# Altium PCB STM32最小系统.PcbDoc
Units mil, origin at the board's own origin, x right, y up, seen from the top; angles counter-clockwise.
Board outline 1973 x 2689 mil, 2 copper layers (Top Layer, Bottom Layer); 45 components, 128 nets, 386 pads, 63 vias.
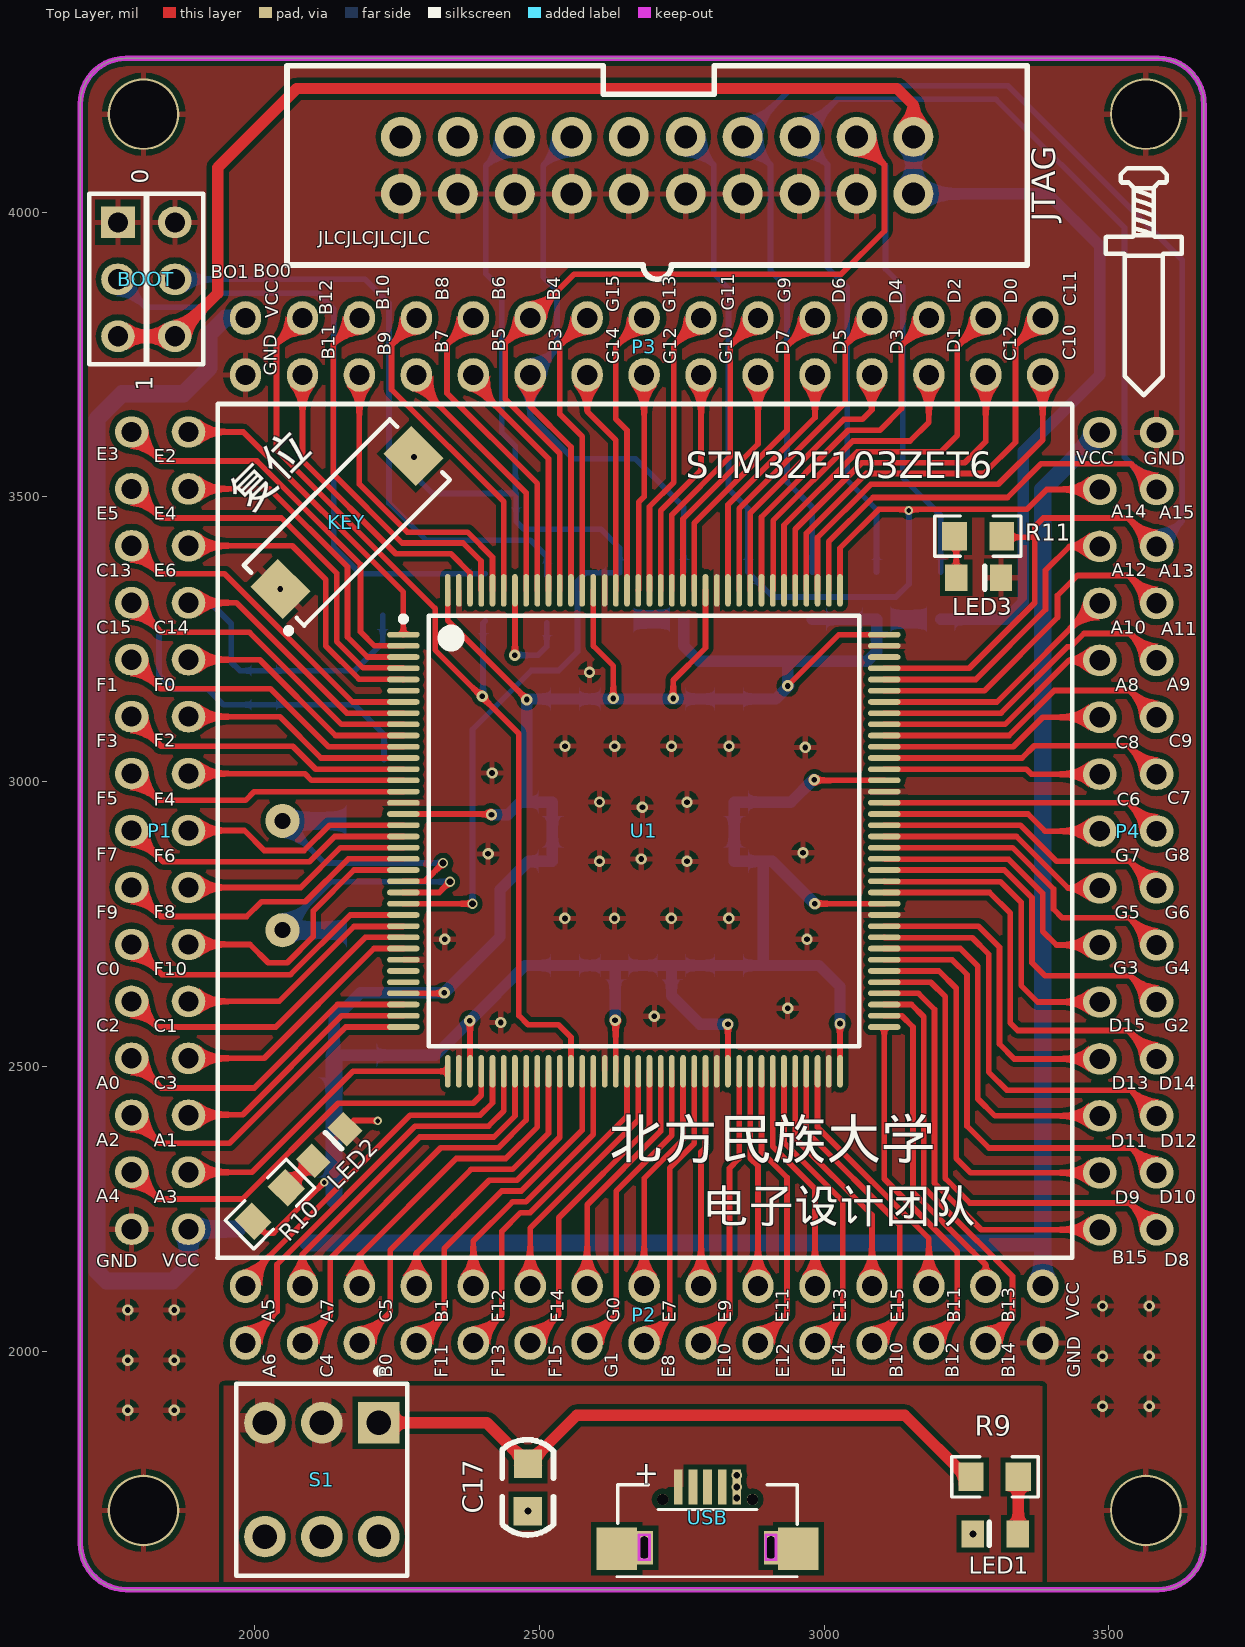
[diagram p0: Top Layer view]
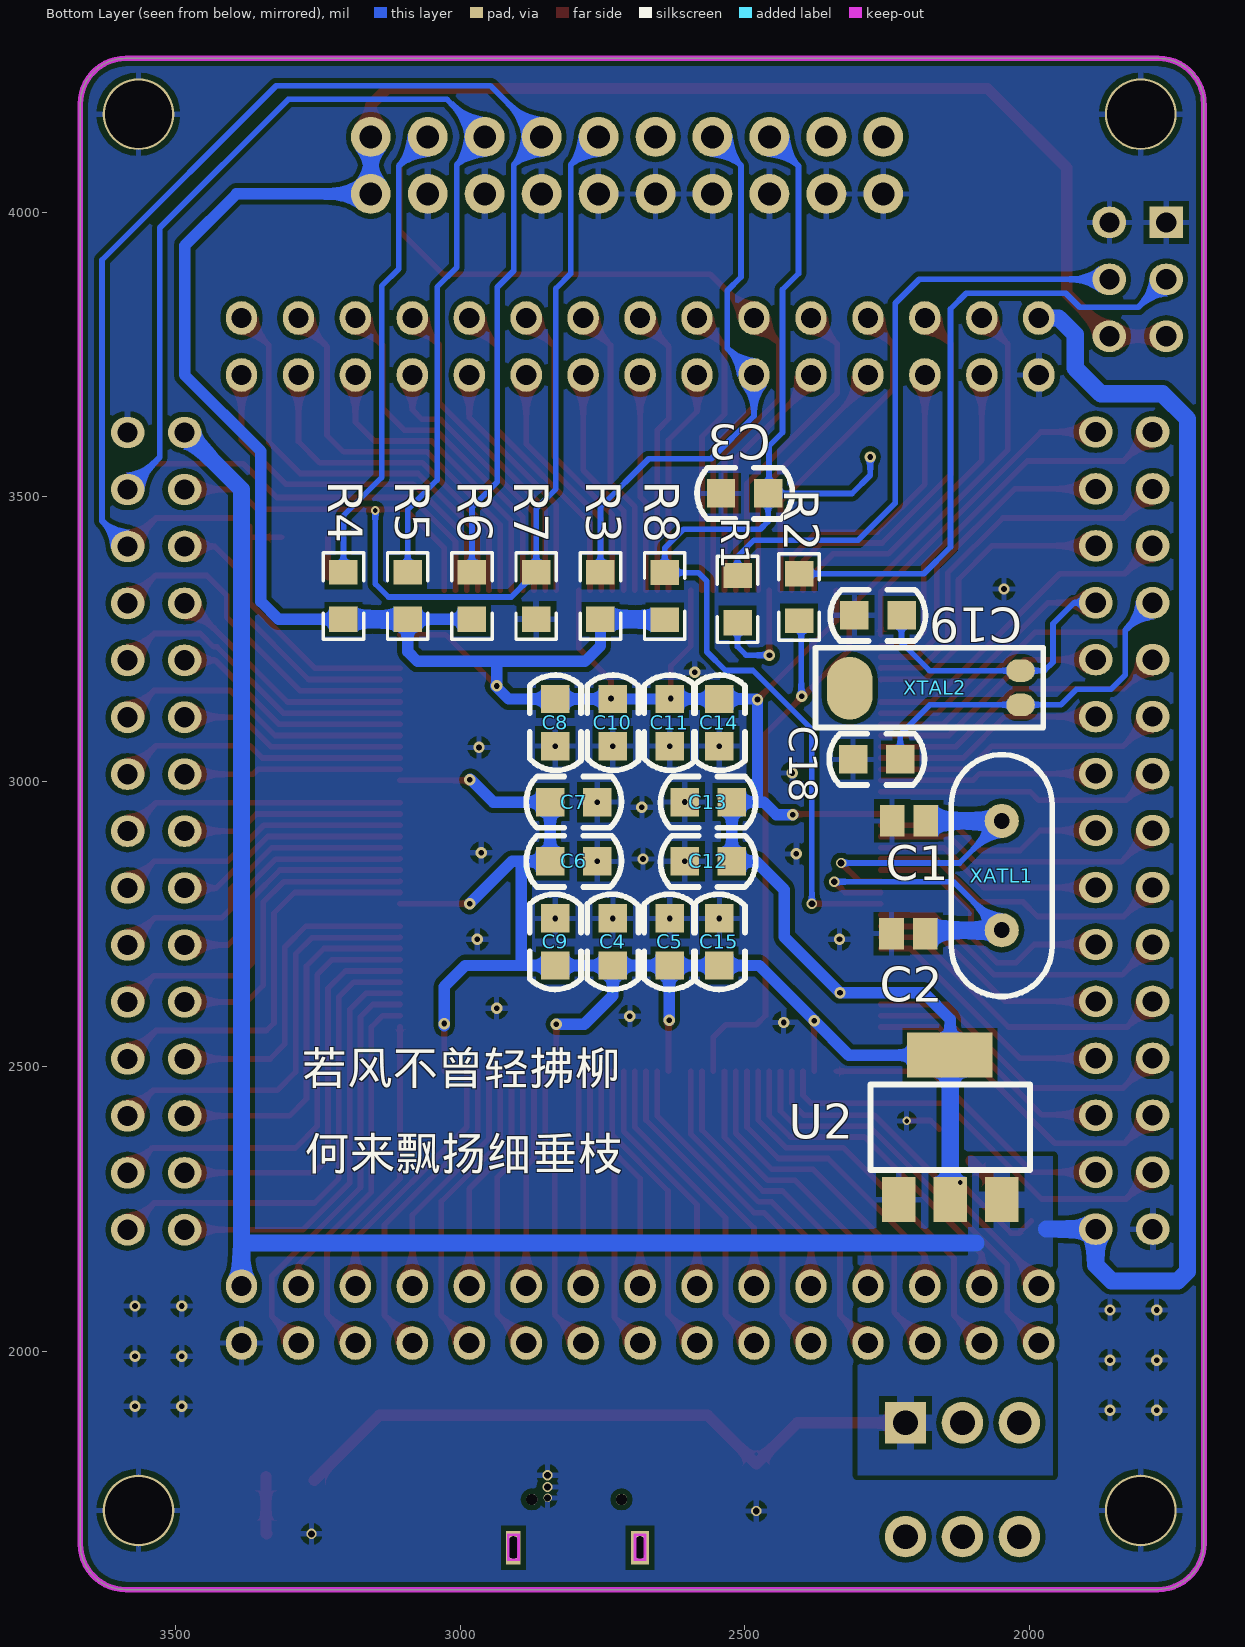
[diagram p1: Bottom Layer view, seen from below]
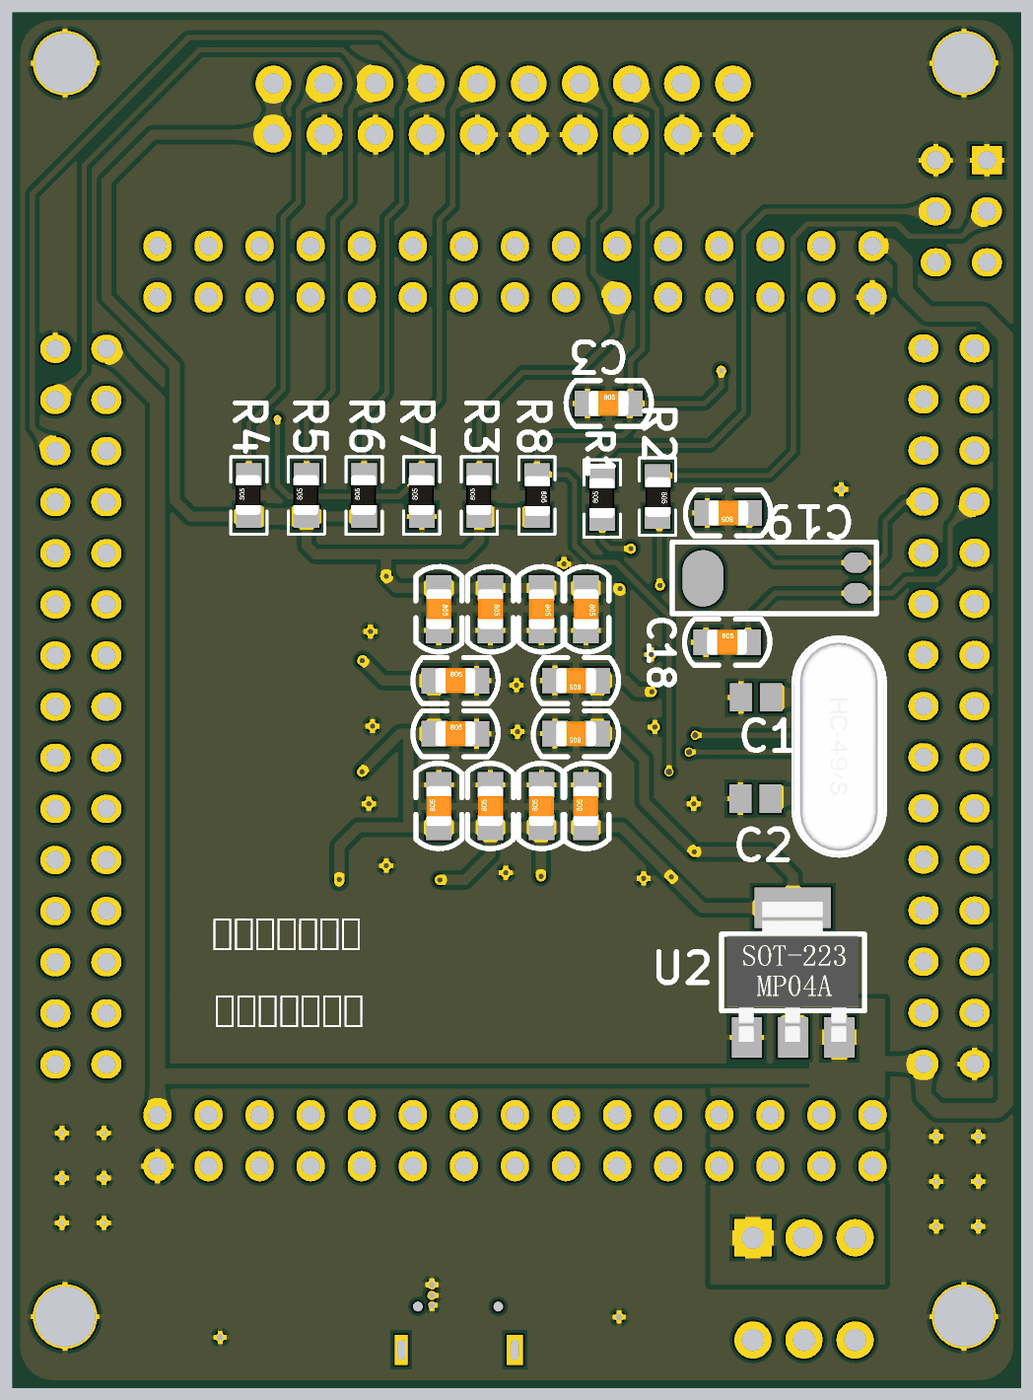
[diagram p2: 3D render of the assembled board from below, using the file's embedded part models]

## Layer stack, top to bottom
Top Solder: solder mask 0.4, Solder Resist, Dk 3.5
Top Layer: signal copper 1.4
Dielectric 1: dielectric 12.6, FR-4, Dk 4.8
Bottom Layer: signal copper 1.4
Bottom Solder: solder mask 0.4, Solder Resist, Dk 3.5

## Board outline
1694,1662.76 ccw(c1775.25,1662.25) 1774.75,1581 3587,1581 ccw(c3587,1661) 3667,1661 3667,4190 ccw(c3587,4190) 3587,4270 1774,4270 ccw(c1774,4190) 1694,4190

## Design rules (kind name [scope] priority, off if disabled: settings)
Clearance [All] p1: gap=9
ComponentClearance [All] p1: gap=0 collisioncheckmode=3 verticalgap=0 showdistances=FALSE
HoleSize [All] p1: absolutevalues=TRUE maxlimit=10000 minlimit=1 maxpercent=80.000 minpercent=20.000
PolygonConnect [All] p1: connectstyle=Relief reliefconductorwidth=10 reliefentries=4 polygonreliefangle="90 Angle" airgapwidth=10
RoutingVias [All] p1: holewidth=28 width=50 viastyle="Through Hole" minholewidth=28 minwidth=50 maxholewidth=28 maxwidth=50
SolderMaskExpansion [All] p1: expansion=4
Width [All] p1: maxlimit=100 minlimit=10 preferedwidth=10
28 further rules are at their usual default settings.

## Components (designator, comment, footprint, x,y, rotation, side; value= is the part's Value field where it differs from the comment)
BOOT "Header 3X2" HDR2X3 1760,3982 r270 top
C1 "C" C0805#1 2212,2931 r0 bottom
C2 "C" C0805#1 2213,2733 r0 bottom
C3 "10UF" C0805#2 2548,3506 r180 bottom
C4 "104" C0805#2 2732,2671 r90 bottom
C5 "104" C0805#2 2632,2671 r90 bottom
C6 "104" C0805#2 2848,2860 r180 bottom
C7 "104" C0805#2 2848,2964 r180 bottom
C8 "104" C0805#2 2833,3151 r270 bottom
C9 "104" C0805#2 2833,2671 r90 bottom
C10 "104" C0805#2 2732,3151 r270 bottom
C11 "104" C0805#2 2632,3151 r270 bottom
C12 "104" C0805#2 2517,2860 r0 bottom
C13 "104" C0805#2 2517,2964 r0 bottom
C14 "104" C0805#2 2545,3151 r270 bottom
C15 "104" C0805#2 2545,2671 r90 bottom
C17 "104" C0805#2 2480,1713 r90 top
C18 "30pf" C0805#2 2316,3039 r180 bottom
C19 "30pf" C0805#2 2219,3292 r0 bottom
JTAG "Header 10X2" "JTAG - duplicate1" 2707,4082 r270 top
KEY "TDS-3" TDS-3 2162,3455 r225 top
LED1 "LED" LED 3340,1679 r180 top
LED2 "LED" LED 2103,2334 r45 top
LED3 "LED" LED 3232,3358 r0 top
P1 "Header 15X2" HDR2X15 1884,2214 r90 top
P2 "Header 15X2" HDR2X15 3384,2114 r180 top
P3 "Header 15X2" HDR2X15 3384,3814 r180 top
P4 "Header 15X2" HDR2X15 3584,2213 r90 top
R1 "100k" "PCBComponent_1 - duplicate1" 2513,3324 r270 bottom
R2 "100k" "PCBComponent_1 - duplicate1" 2405,3320 r90 bottom
R3 "10k" "PCBComponent_1 - duplicate1" 2640.86,3321.97 r90 bottom
R4 "10k" "PCBComponent_1 - duplicate1" 3205,3330 r270 bottom
R5 "10k" "PCBComponent_1 - duplicate1" 3092.17,3330 r270 bottom
R6 "10k" "PCBComponent_1 - duplicate1" 2979.34,3330 r270 bottom
R7 "10k" "PCBComponent_1 - duplicate1" 2866.51,3330 r270 bottom
R8 "10k" "PCBComponent_1 - duplicate1" 2753.69,3330 r270 bottom
R9 "1k" "PCBComponent_1 - duplicate1" 3296,1779 r0 top
R10 "471" "PCBComponent_1 - duplicate1" 2024,2255 r45 top
R11 "471" "PCBComponent_1 - duplicate1" 3274,3431 r180 top
S1 "SW-DPDT" DPDT-6 2118,1774 r270 top
U1 "STM32F103Z" LQFP-144N 2683.5,2913.5 r0 top
U2 "LM1117" SOT-223 2142,2396 r180 bottom
USB "Micro USB" "PCBComponent_1 - duplicate2" 2786,1713 r270 top
XATL1 "8MHz" 49/S_N 2049,2931 r270 bottom
XTAL2 "XTAL_32.768K" XTAL_32.768K 2316,3164 r180 bottom

## Footprints (in the part's own frame and the unit in brackets; to place one, negate y for a bottom-side part, rotate by r counter-clockwise, add the part's x,y. Pads: shape width x height; smd on the part's side, far side on the other; paste and mask are expansions set on the pad)
49/S_N [mil] "短型晶振（未加焊）"
  round 60 hole 28: 1(0,0) 2(192,0)
  silkscreen extent -116,-89 308,88, body extent -116,-89 309,88, height 138
C0805#1 [mm] "Chip Capacitor, Body 2.0x1.3mm, IPC High Density"
  rect 1.1x1.4 smd: 1(-0.75,0) 2(0.75,0)
  body extent -1.1,-0.72 1.1,0.72, height 1.4
C0805#2 [mm]
  rect 1.27x1.27 smd: 1(0.152,0) 2(2.253,-0.003)
  silkscreen extent -0.92,-1.14 3.33,1.14, body extent 0.2,-0.62 2.2,0.63, height 0.77
DPDT-6 [mm] "Switch; 6 Leads"
  rect 1.85x1.85 hole 1.1: 1(-2.54,2.54)
  round 1.85 hole 1.1: 2(-2.54,0) 3(-2.54,-2.54) 4(2.54,-2.54) 5(2.54,0) 6(2.54,2.54)
  silkscreen extent -4.96,-3.81 4.28,3.81
HDR2X3 [mm] "Connector; Header; 3x2 Position"
  rect 1.397x1.5 hole 0.9: 1(0,0)
  oval 1.397x1.5 hole 0.9: 2(0,2.54) 3(2.54,0) 4(2.54,2.54) 5(5.08,0) 6(5.08,2.54)
HDR2X15 [mm] "Connector; Header; 15x2 Position"
  oval 1.397x1.5 hole 0.9: 1(0,0) 2(0,2.54) 3(2.54,0) 4(2.54,2.54) 5(5.08,0) 6(5.08,2.54) 7(7.62,0) 8(7.62,2.54) 9(10.16,0) 10(10.16,2.54) 11(12.7,0) 12(12.7,2.54) 13(15.24,0) 14(15.24,2.54) 15(17.78,0) 16(17.78,2.54) 17(20.32,0) 18(20.32,2.54) 19(22.86,0) 20(22.86,2.54) 21(25.4,0) 22(25.4,2.54) 23(27.94,0) 24(27.94,2.54) 25(30.48,0) 26(30.48,2.54) 27(33.02,0) 28(33.02,2.54) 29(35.56,0) 30(35.56,2.54)
"JTAG - duplicate1" [mil]
  round 70 hole 40: 1(-50,450) 2(50,450) 3(-50,350) 4(50,350) 5(-50,250) 6(50,250) 7(-50,150) 8(50,150) 9(-50,50) 10(50,50) 11(-50,-50) 12(50,-50) 13(-50,-150) 14(50,-150) 15(-50,-250) 16(50,-250) 17(-50,-350) 18(50,-350) 19(-50,-450) 20(50,-450)
  silkscreen extent -175,-650 200,650
LED [mm]
  rect 1x1.2 smd: 1(0,0) 2(2,0)
  silkscreen extent 1.27,-0.51 1.27,0.51
LQFP-144N [mm] "LQFP, 144-Leads, Body 20.00x20.00mm, Pitch 0.50mm, IPC Medium Density"
  oval 1.45x0.254 smd: 1(-10.725,8.75) 2(-10.725,8.25) 3(-10.725,7.75) 4(-10.725,7.25) 5(-10.725,6.75) 6(-10.725,6.25) 7(-10.725,5.75) 8(-10.725,5.25) 9(-10.725,4.75) 10(-10.725,4.25) 11(-10.725,3.75) 12(-10.725,3.25) 13(-10.725,2.75) 14(-10.725,2.25) 15(-10.725,1.75) 16(-10.725,1.25) 17(-10.725,0.75) 18(-10.725,0.25) 19(-10.725,-0.25) 20(-10.725,-0.75) 21(-10.725,-1.25) 22(-10.725,-1.75) 23(-10.725,-2.25) 24(-10.725,-2.75) 25(-10.725,-3.25) 26(-10.725,-3.75) 27(-10.725,-4.25) 28(-10.725,-4.75) 29(-10.725,-5.25) 30(-10.725,-5.75) 31(-10.725,-6.25) 32(-10.725,-6.75) 33(-10.725,-7.25) 34(-10.725,-7.75) 35(-10.725,-8.25) 36(-10.725,-8.75) 73(10.725,-8.75) 74(10.725,-8.25) 75(10.725,-7.75) 76(10.725,-7.25) 77(10.725,-6.75) 78(10.725,-6.25) 79(10.725,-5.75) 80(10.725,-5.25) 81(10.725,-4.75) 82(10.725,-4.25) 83(10.725,-3.75) 84(10.725,-3.25) 85(10.725,-2.75) 86(10.725,-2.25) 87(10.725,-1.75) 88(10.725,-1.25) 89(10.725,-0.75) 90(10.725,-0.25) 91(10.725,0.25) 92(10.725,0.75) 93(10.725,1.25) 94(10.725,1.75) 95(10.725,2.25) 96(10.725,2.75) 97(10.725,3.25) 98(10.725,3.75) 99(10.725,4.25) 100(10.725,4.75) 101(10.725,5.25) 102(10.725,5.75) 103(10.725,6.25) 104(10.725,6.75) 105(10.725,7.25) 106(10.725,7.75) 107(10.725,8.25) 108(10.725,8.75)
  oval 0.254x1.45 smd: 37(-8.75,-10.725) 38(-8.25,-10.725) 39(-7.75,-10.725) 40(-7.25,-10.725) 41(-6.75,-10.725) 42(-6.25,-10.725) 43(-5.75,-10.725) 44(-5.25,-10.725) 45(-4.75,-10.725) 46(-4.25,-10.725) 47(-3.75,-10.725) 48(-3.25,-10.725) 49(-2.75,-10.725) 50(-2.25,-10.725) 51(-1.75,-10.725) 52(-1.25,-10.725) 53(-0.75,-10.725) 54(-0.25,-10.725) 55(0.25,-10.725) 56(0.75,-10.725) 57(1.25,-10.725) 58(1.75,-10.725) 59(2.25,-10.725) 60(2.75,-10.725) 61(3.25,-10.725) 62(3.75,-10.725) 63(4.25,-10.725) 64(4.75,-10.725) 65(5.25,-10.725) 66(5.75,-10.725) 67(6.25,-10.725) 68(6.75,-10.725) 69(7.25,-10.725) 70(7.75,-10.725) 71(8.25,-10.725) 72(8.75,-10.725) 109(8.75,10.725) 110(8.25,10.725) 111(7.75,10.725) 112(7.25,10.725) 113(6.75,10.725) 114(6.25,10.725) 115(5.75,10.725) 116(5.25,10.725) 117(4.75,10.725) 118(4.25,10.725) 119(3.75,10.725) 120(3.25,10.725) 121(2.75,10.725) 122(2.25,10.725) 123(1.75,10.725) 124(1.25,10.725) 125(0.75,10.725) 126(0.25,10.725) 127(-0.25,10.725) 128(-0.75,10.725) 129(-1.25,10.725) 130(-1.75,10.725) 131(-2.25,10.725) 132(-2.75,10.725) 133(-3.25,10.725) 134(-3.75,10.725) 135(-4.25,10.725) 136(-4.75,10.725) 137(-5.25,10.725) 138(-5.75,10.725) 139(-6.25,10.725) 140(-6.75,10.725) 141(-7.25,10.725) 142(-7.75,10.725) 143(-8.25,10.725) 144(-8.75,10.725)
  silkscreen extent -10.85,-9.6 9.6,9.6, body extent -11,-11 11,11, height 1.6
"PCBComponent_1 - duplicate1" [mm]
  rect 1.12x1.27 smd: 1(1.143,0)
  rect 1.1x1.27 smd: 2(-0.962,0)
  silkscreen extent -1.82,-0.9 2.03,0.9, body extent -0.92,-0.65 1.08,0.6, height 0.77
"PCBComponent_1 - duplicate2" [mm]
  rect 1.55x0.381 smd: 1(-1.222,-1.06) 2(-1.222,-0.41) 4(-1.222,0.89) 5(-1.222,1.54)
  rect 1.55x0.4 smd: 3(-1.222,0.24)
  rect 1.5x0.635 hole 0.4 slot 1 at 0 deg: 6(1.478,3.065)
  rect 1.5x0.8 hole 0.4 slot 1 at 0 deg: 6(1.478,-2.585)
  rect 1.9x1.8 smd: 6(1.528,4.29) 6(1.528,-3.81)
  round 0.5 hole 0.5 unplated: ""(-0.672,2.24) ""(-0.672,-1.76)
  Keep-Out Layer lines w0.127: 2.021,-2.814 0.904,-2.814 0.904,-2.357 2.021,-2.357 2.021,-2.814 ; 2.021,2.836 0.904,2.836 0.904,3.293 2.021,3.293 2.021,2.836
  silkscreen extent -1.32,-3.81 2.78,4.24
SOT-223 [mil]
  rect 59x79 smd: 1(-88,-130) 2(2.55,-130) 3(93.1,-130)
  rect 150x79 smd: 4(1.88,123.54)
  silkscreen extent -137,-78 143,72, body extent -126,-139 130,135, height 67
TDS-3 [mm] "TDS-3"
  rect 1.75x2.05 smd: 1(-4.2,0) 2(4.2,0)
  silkscreen extent -4.6,-1.9 5.37,1.9, body extent -4.55,-1.9 4.55,1.9, height 2.5
XTAL_32.768K [mil]
  oval 80x110.24 smd: 0(0,0)
  oval 50x40 smd: 1(300,-29.21) 2(300,30.79)
  silkscreen extent -60,-69 340,71

## Part data
BOOT: "Header, 3-Pin, Dual row"
C1 C2: library part "Cap Pol3", "Polarized Capacitor (Surface Mount)"
C3 C4 C5 C6 C7 C8 C9 C10 C11 C12 C13 C14 C15 C17 C18 C19: library part Cap_0805
JTAG: "Header, 10-Pin, Dual row"
P1 P2 P3 P4: "Header, 15-Pin, Dual row"
R1 R2 R3 R4 R5 R6 R7 R8 R9 R10 R11: library part 贴片电阻
S1: "Double-Pole, Double-Throw Switch"
U1: library part STM32F103Z_T, "High-density performance line ARM?-based 32-bit MCU with 256 to 512KB  Flash, USB, CAN, 11 timers, 3 ADCs, 13 communication interfaces"
XATL1: library part XATL

## Free pads (board coordinates)
  round 125.98 hole 118.11: 0(1805,4172) 1(3565,4172) 2(1805,1720) 3(3565,1720)

## Via types
v1: diameter 20, hole 10, Top Layer to Bottom Layer, 52 vias
v2: diameter 18, hole 12, Top Layer to Bottom Layer, 7 vias
v3: diameter 15, hole 8, Top Layer to Bottom Layer, 3 vias
v4: diameter 15, hole 12, Top Layer to Bottom Layer, 1 vias

## Nets (pads, with @x,y where several pads share a name; then routed paths per layer and width w, separated by ;. In a path a pad name is that pad's centre, name@x,y a point inside that pad or via, vN(x,y) a via of type N, cw(c..) or ccw(c..) an arc to the next point about the centre after c; other vN are vias at no path point)
3.3V: BOOT.5 BOOT.6 C4.1 C5.1 C6.1 C7.1 C8.1 C9.1 C10.1 C11.1 C12.1 C13.1 C14.1 C15.1 JTAG.1 JTAG.2 R3.2 R4.1 R5.1 R6.1 R8.1 R10.2 U1.17 U1.33 U1.39 U1.52 U1.62 U1.72 U1.84 U1.95 U1.108 U1.121 U1.131 U1.144 U2.2 U2.4 | length 9204.3
  Top Layer w10: R10.2 2018.44,2207 2033,2207 v3(2122,2296) ; U1.33 v1@2333.07,2628.07 ; U1.17 v1@2414.97,2943.03 ; U1.144 2339.01,3282.99 v1(2478,3144) ; U1.39 v1@2378.38,2581.38 ; U1.131 2594.92,3238.08 2630,3203 v1(2630,3146) ; U1.52 v1@2634.29,2579.71 ; v1(2735,3146) 2735,3178 2791.77,3234.77 U1.121 ; U1.62 v1(2831.14,2574) ; v1(2936,3168) 3025.99,3257.99 U1.108 ; v1(2983.45,2785.55) U1.84 ; v1@2983.92,3002.08 U1.95 ; U1.72 v1(3027.99,2575.01)
  Top Layer w20: BOOT.5 BOOT.6 1935,3857 1935,4078 2074,4217 3128,4217 3157,4188 JTAG.1 ; v1@2414.97,2943.03 v1(2416,2942) ; v1(2633,2581) v1@2634.29,2579.71 ; v1(2983,3003) v1@2983.92,3002.08
  Bottom Layer w20: U2.4@2139.45,2518.88 2139.45,2582.45 2186,2629 v1(2333,2629) 2431,2727 2431,2810 2481,2860 C12.1 C13.1 2478,2964 ; U2.4 2317.54,2519.54 v1(2378,2580) 2475,2677 C15.1 C5.1 ; v1(2416,2942) 2445,2942 2467,2964 2478,2964 ; v1(2478,3144) 2478,2964 ; v1@2480,3145 C14.1 C11.1 C10.1 C8.1 2915,3145 v1@2938,3168 ; v1(2633,2581) 2633,2676 C5.1 ; R8.1 2753.69,3238.31 2781,3211 2931,3211 3075,3211 3092.17,3228.17 R5.1 R6.1 ; v1(2831.14,2574) 2782,2574 2732,2624 C4.1 ; 2893,2679 2893,2860 ; v1(2936,3168) 2936,3206 ; v1@2982,3004 2942,2964 C7.1 C6.1 2893,2860 ; v1(2983.45,2785.55) 2909,2860 2893,2860 ; v1@3028,2571 3028,2640 2991,2677 C9.1 C4.1 ; JTAG.1 JTAG.2 3393,4032 3484,3941 3484,3714 3350,3580 3350,3316 3319,3285 R4.1 ; C5.1 C4.1
  Bottom Layer w30: U2.2 U2.4@2139.45,2518.88
BAT: U1.6
BOOT0: R1.1 U1.138 | length 218
  Top Layer w10: v1(2457,3222) 2457.12,3222.12 U1.138
  Bottom Layer w10: v1(2457,3222) 2498,3222 2513,3237 R1.1
BOOT1: P3.27 R2.2 U1.48 | length 1721.4
  Top Layer w10: P3.27 2038.44,3768.44 2038.44,3582.44 2317,3303.87 2317,3231 2464,3084 2464,2589 2480,2573 2533.55,2573 2555.55,2551 U1.48
  Bottom Layer w10: v1(2400,3150) 2401,3151 2401,3278.13 R2.2
GND: BOOT.1 BOOT.2 C1.2 C2.2 C3.1 C4.2 C5.2 C6.2 C7.2 C8.2 C9.2 C10.2 C11.2 C12.2 C13.2 C14.2 C15.2 C17.1 C18.1 C19.2 JTAG.4 JTAG.6 JTAG.8 JTAG.10 JTAG.12 JTAG.14 JTAG.16 JTAG.18 JTAG.20 KEY.2 LED1.2 LED2.2 LED3.2 P1.2 P2.2 P3.30 P4.29 pad.0 pad.1 pad.2 pad.3 R7.1 U1.16 U1.30 U1.38 U1.51 U1.61 U1.71 U1.83 U1.94 U1.107 U1.120 U1.130 U1.143 U2.1 USB.5 | length 64.1
  Top Layer w10: LED2.2 2174,2405 2215,2405 v3(2216,2404)
  other v1: 1777,1896 1859,1896 3489,1903 3571,1903 1777,1984 1859,1984 3489,1991 3571,1991 1777,2072 1859,2072 3489,2079 3571,2079 2432,2577 2702,2588 2936,2602 2334,2723 2970,2723 2544.9,2759.7 2631.9,2759.7 2731.9,2759.7 2832.9,2759.7 2605.7,2860.1 2759.3,2859.9 2679,2864 2410,2873 2963,2875 2681,2955 2605.7,2964.1 2759.3,2963.9 2417,3015 2967,3060 2545.1,3062.3 2632.1,3062.3 2732.1,3062.3 2833.1,3062.3 2588,3192 2045.08,3338.08
  other v2: 3261.26,1679 2480,1719 2846.62,1761.1 2846.62,1782
  other v4: 2846.62,1742
JTCK: JTAG.9 P4.28 R7.2 U1.109 | length 1821.6
  Top Layer w10: U1.109 3027.99,3409.99 3096,3478 3356,3478 3391,3513 P4.28
  Bottom Layer w10: JTAG.9 2806,4083 2806,3892 2832,3866 2832,3514 2866.51,3479.49 R7.2 2910.39,3324 3126,3324 3149,3347 v3(3149,3476)
JTDI: JTAG.5 P4.27 R5.2 U1.110 | length 2730.8
  Top Layer w10: U1.110 3008.3,3421.3 3086,3499 3322,3499 3381,3558 3539,3558 P4.27
  Bottom Layer w10: R5.2 3092.17,3477.83 3040.47,3529.53 3040.47,3868.53 3006,3903 3006,4083 JTAG.5 3023,4198 3302,4198 3527.53,3972.47 3527.53,3569.47 P4.27
JTDO: JTAG.13 P3.20 R8.2 U1.133 | length 1398.3
  Top Layer w10: P3.20 2484,3659 2555.55,3587.45 U1.133
  Bottom Layer w10: JTAG.13 2507,4082 2507,3886 2531,3862 2531,3761 P3.20 2484,3642 2559,3567 2669,3567 2753.69,3482.31 R8.2
JTMS: JTAG.7 P4.25 R6.2 R11.2 U1.105 | length 3015.4
  Top Layer w10: U1.105 3254.93,3198.93 3370,3314 3370,3429 ; R11.2@3313.87,3429 3370,3429 ; P4.25 3534,3463 3385,3463 3370,3448 3370,3429
  Bottom Layer w10: R6.2 2979.34,3481.66 2935,3526 2935,3868 2906,3897 2906,4083 JTAG.7 2947,4222 3323,4222 3629,3916 3629,3458 P4.25
JTRST: JTAG.3 P3.19 R4.2 U1.134 | length 2232.3
  Top Layer w10: U1.134 2535.86,3576.21 2440,3672.07 2440,3770 P3.19 2561,3891 3030,3891 3106,3967 3106,4083 JTAG.3
  Bottom Layer w10: JTAG.3 3108,4081 3108,3900 3138,3870 3138,3534 3205,3467 R4.2
NetBOOT_3: BOOT.3 R2.1 | length 1124.3
  Bottom Layer w10: BOOT.3 1809,3833 1912,3833 1936.53,3857.53 2111.47,3857.53 2139,3830 2139,3412 2186,3365 R2.1
NetBOOT_4: BOOT.4 R1.2 | length 1093.5
  Bottom Layer w10: BOOT.4 2194,3882 2236,3840 2236,3489 2301,3424 2484,3424 2513,3395 R1.2
NetC1_1: C1.1 U1.23 XATL1.1 | length 395.7
  Top Layer w10: U1.23 2298.92,2824.92 v2(2331,2857)
  Bottom Layer w10: XATL1.1 2123,2857 v2(2331,2857)
NetC2_1: C2.1 U1.24 XATL1.2 | length 418.7
  Top Layer w10: U1.24 2324.23,2805.23 v2(2343,2824)
  Bottom Layer w10: XATL1.2 2134,2824 v2(2343,2824)
NetLED1_1: LED1.1 R9.1 | length 100.4
  Top Layer w20: LED1.1 3341,1680 R9.1
NetLED2_1: LED2.1 R10.1 | length 66.7
  Top Layer w20: R10.1 LED2.1
NetLED3_1: LED3.1 R11.1 | length 70
  Top Layer w10: LED3.1 R11.1@3232,3428
NetS1_2: S1.2 S1.3 USB.1
PA0: P1.8 U1.34 | length 559.4
  Top Layer w10: P1.8 1836,2462 1999.26,2462 2145.64,2608.38 U1.34
PA1: P1.5 U1.35 | length 449.6
  Top Layer w10: P1.5 1885,2415 1979.13,2415 2152.83,2588.7 U1.35
PA2: P1.6 U1.36 | length 582.1
  Top Layer w10: P1.6 1833,2365 1956,2365 2160.01,2569.01 U1.36
PA3: P1.3 U1.37 | length 528.4
  Top Layer w10: P1.3 1995.39,2314 2172.65,2491.26 U1.37
PA4: P1.4 U1.40 | length 751.1
  Top Layer w10: P1.4 1831,2267 1979,2267 2147,2435 2384,2435 2398.07,2449.07 U1.40
PA5: P2.29 U1.41 | length 629
  Top Layer w10: P2.29 1984,2125 2273,2414 2396,2414 2417.75,2435.75 U1.41
PA6: P2.30 U1.42 | length 740.5
  Top Layer w10: P2.30 2039.2,2069.2 2039.2,2152.01 2282.19,2395 2411,2395 2437.44,2421.44 U1.42
PA7: P2.27 U1.43 | length 608
  Top Layer w10: P2.27 2084,2169.94 2290.06,2376 2420.13,2376 2457.12,2412.99 U1.43
PA8: P4.22 U1.100 | length 424.9
  Top Layer w10: U1.100 3317.77,3100.51 3430.26,3213 P4.22
PA9: P4.21 U1.101 | length 555.6
  Top Layer w10: U1.101 3310.58,3120.19 3426.96,3236.57 3432.91,3236.57 3456.35,3260 3537,3260 P4.21
PA10: P4.24 U1.102 | length 450
  Top Layer w10: U1.102 3303.4,3139.88 3476.52,3313 P4.24
PA11: P4.23 U1.103 | length 605.2
  Top Layer w10: U1.103 3281.56,3159.56 3410,3288 3410,3327 3445,3362 3535,3362 P4.23
PA12: P4.26 U1.104 | length 515.5
  Top Layer w10: U1.104 3266.25,3179.25 3389,3302 3389,3371 3431,3413 P4.26
PB0: P2.26 U1.46 | length 657.4
  Top Layer w10: P2.26 2238,2068 2238,2177 2380,2319 2452.61,2319 2516.18,2382.57 U1.46
PB1: P2.23 U1.47 | length 510
  Top Layer w10: P2.23 2284,2172 2412,2300 2460.48,2300 2535.86,2375.38 U1.47
PB5: P3.22 U1.135 | length 433
  Top Layer w10: P3.22 2384,3699 2516.18,3566.82 U1.135
PB6: P3.21 U1.136 | length 563
  Top Layer w10: P3.21 2338,3768 2338,3682 2496.49,3523.51 U1.136
PB7: P3.24 U1.137 | length 458.1
  Top Layer w10: P3.24 2284,3700 2476.81,3507.19 U1.137
PB8: P3.23 U1.139 | length 577.9
  Top Layer w10: P3.23 2284,3811 2240.47,3767.47 2240.47,3688.53 2437.44,3491.56 U1.139
PB9: P3.26 U1.140 | length 537
  Top Layer w10: P3.26 2184,3522 2268,3438 2373.74,3438 2417.75,3393.99 U1.140
PB10: P2.8 U1.69 | length 565.5
  Top Layer w10: U1.69 2968.93,2385.72 3133,2221.65 3133,2063 P2.8
PB11: P2.5 U1.70 | length 458.2
  Top Layer w10: U1.70 2988.62,2392.9 3184,2197.52 P2.5
PB12: P2.6 U1.73 | length 628.8
  Top Layer w10: U1.73 3105.74,2302.65 3234,2174.39 3234,2064 P2.6
PB13: P2.3 U1.74 | length 566.7
  Top Layer w10: U1.74 3136.47,2588.7 3156,2569.17 3156,2279.26 3260.26,2175 3260.61,2175 3284,2151.61 P2.3
PB14: P2.4 U1.75 | length 735.4
  Top Layer w10: U1.75 3153.62,2608.38 3175,2587 3175,2287.13 3268.13,2194 3268.48,2194 3331,2131.48 3331,2061 P2.4
PB15: P4.2 U1.76 | length 728.8
  Top Layer w10: U1.76 3165.93,2628.07 3194,2600 3194,2295 3276,2213 P4.2
PC0: P1.12 U1.26 | length 542.6
  Top Layer w10: P1.12 1837,2661 2063.13,2661 2167.99,2765.86 U1.26
PC1: P1.9 U1.27 | length 432
  Top Layer w10: P1.9 2043,2614 2174.49,2745.49 2260.57,2745.49 U1.27
PC2: P1.10 U1.28 | length 561.1
  Top Layer w10: P1.10 1829,2569 2037,2569 2194.49,2726.49 U1.28
PC3: P1.7 U1.29 | length 457.1
  Top Layer w10: P1.7 2017,2514 2209.81,2706.81 U1.29
PC4: P2.28 U1.44 | length 699.1
  Top Layer w10: P2.28 2133,2063 2133,2163 2327,2357 2428,2357 2476.81,2405.81 U1.44
PC5: P2.25 U1.45 | length 557.7
  Top Layer w10: P2.25 2184,2168 2354,2338 2441,2338 2496.49,2393.49 U1.45
PC6: P4.18 U1.96 | length 381.9
  Top Layer w10: U1.96 3355.23,3021.77 3364,3013 P4.18
PC7: P4.17 U1.97 | length 507.9
  Top Layer w10: U1.97 3347.45,3041.45 3369,3063 3534,3063 P4.17
PC8: P4.20 U1.98 | length 399.7
  Top Layer w10: U1.98 3332.14,3061.14 3384,3113 P4.20
PC9: P4.19 U1.99 | length 530.5
  Top Layer w10: U1.99 3324.95,3080.82 3404.13,3160 3537,3160 P4.19
PC10: P3.2 U1.111 | length 673.2
  Top Layer w10: U1.111 2988.62,3428.49 3082.13,3522 3306,3522 3384,3600 P3.2
PC11: P3.1 U1.112 | length 771.4
  Top Layer w10: U1.112 2968.93,3435.93 3074,3541 3281,3541 3336,3596 3336,3766 P3.1
PC12: P3.4 U1.113 | length 622.9
  Top Layer w10: U1.113 2949.25,3443.12 3066.13,3560 3247,3560 3284,3597 P3.4
PC13: P1.26 U1.7 | length 590.8
  Top Layer w10: P1.26 1833,3365 1947,3365 2172.12,3139.88 U1.7
PC14: C19.1 P1.23 U1.8 XTAL2.2 | length 955.8
  Top Layer w10: P1.23 1968,3314 2161.81,3120.19 U1.8
  Bottom Layer w10: P1.23 1922,3314 1959,3277 1959,3209.58 1973.79,3194.79 XTAL2.2 2175.79,3194.79 2225,3244 C19.1
PC15: C18.2 P1.24 U1.9 XTAL2.1 | length 1194.9
  Top Layer w10: P1.24 1836,3262 1991,3262 2152.49,3100.51 U1.9
  Bottom Layer w10: P1.24 1832,3266 1832,3187 1857,3162 1918,3162 1945.21,3134.79 XTAL2.1 2175.21,3134.79 2227.3,3082.7 C18.2
PD0: P3.3 U1.114 | length 711
  Top Layer w10: U1.114 2929.56,3450.3 3058.26,3579 3205,3579 3234,3608 3234,3764 P3.3
PD1: P3.6 U1.115 | length 550.7
  Top Layer w10: U1.115 2910.56,3336.43 2910.56,3458.17 3050.39,3598 3151,3598 3184,3631 P3.6
PD2: P3.5 U1.116 | length 632.5
  Top Layer w10: U1.116 2890.19,3464.67 3042.52,3617 3098,3617 3136,3655 3136,3766 P3.5
PD3: P3.8 U1.117 | length 485.6
  Top Layer w10: U1.117 2870.51,3471.86 3034.65,3636 3067,3636 3084,3653 P3.8
PD4: P3.7 U1.118 | length 574.8
  Top Layer w10: U1.118 2850.82,3479.04 3037,3665.22 3037,3767 P3.7
PD5: P3.10 U1.119 | length 441.6
  Top Layer w10: U1.119 2831.14,3486.23 2984,3639.09 P3.10
PD6: P3.9 U1.122 | length 566
  Top Layer w10: U1.122 2772.08,3454.04 2935,3616.96 2935,3765 P3.9
PD7: P3.12 U1.123 | length 432.8
  Top Layer w10: U1.123 2752.4,3461.23 2884,3592.83 P3.12
PD8: P4.1 U1.77 | length 845.2
  Top Layer w10: U1.77 3187.25,2647.75 3213,2622 3213,2303 3256,2260 3537,2260 P4.1
PD9: P4.4 U1.78 | length 700.2
  Top Layer w10: U1.78 3201.56,2667.44 3232,2637 3232,2338 3257,2313 P4.4
PD10: P4.3 U1.79 | length 789
  Top Layer w10: U1.79 3224.88,2687.12 3251,2661 3251,2395 3289.47,2356.53 3540.47,2356.53 P4.3
PD11: P4.6 U1.80 | length 636.4
  Top Layer w10: U1.80 3239.19,2706.81 3270,2676 3270,2443 3300,2413 P4.6
PD12: P4.5 U1.81 | length 729.4
  Top Layer w10: U1.81 3106.43,2725.81 3260.19,2725.81 3289,2697 3289,2490 3321,2458 3539,2458 P4.5
PD13: P4.8 U1.82 | length 574.4
  Top Layer w10: U1.82 3270.82,2746.18 3308,2709 3308,2539 3334,2513 P4.8
PD14: P4.7 U1.85 | length 712.4
  Top Layer w10: U1.85 3290.77,2805.23 3327,2769 3327,2576 3340,2563 3534,2563 P4.7
PD15: P4.10 U1.86 | length 551.6
  Top Layer w10: U1.86 3106.43,2824.23 3309.77,2824.23 3346,2788 3346,2642 3375,2613 P4.10
PE0: P3.25 U1.141 | length 668
  Top Layer w10: P3.25 2138,3768 2138,3540 2259,3419 2365.87,3419 2397.38,3387.49 2397.38,3335.74 U1.141
PE1: P3.28 U1.142 | length 557.1
  Top Layer w10: P3.28 2084,3563.74 2247.74,3400 2344.85,3400 2378.38,3366.47 U1.142
PE2: P1.29 U1.1 | length 568.5
  Top Layer w10: P1.29 1980,3614 2261.26,3332.74 U1.1
PE3: P1.30 U1.2 | length 702.1
  Top Layer w10: P1.30 1835,3563 2004.13,3563 2186,3381.13 2186,3263 2210.7,3238.3 U1.2
PE4: P1.27 U1.3 | length 571.8
  Top Layer w10: P1.27 2026.26,3514 2163,3377.26 2163,3254 2198.38,3218.62 U1.3
PE5: P1.28 U1.4 | length 678.4
  Top Layer w10: P1.28 1835,3463 2047,3463 2144,3366 2144,3246.13 2190.51,3199.62 2261.26,3199.62 U1.4
PE6: P1.25 U1.5 | length 543.3
  Top Layer w10: P1.25 2066,3414 2125,3355 2125,3238.26 2183.33,3179.93 2261.26,3179.93 U1.5
PE7: P2.15 U1.58 | length 405.6
  Top Layer w10: P2.15 2684,2303.26 2752.4,2371.66 U1.58
PE8: P2.16 U1.59 | length 513.7
  Top Layer w10: P2.16 2729,2059 2729,2321.39 2772.08,2364.47 U1.59
PE9: P2.13 U1.60 | length 380.5
  Top Layer w10: P2.13 2784,2349.52 2791.77,2357.29 U1.60
PE10: P2.14 U1.63 | length 504.9
  Top Layer w10: P2.14 2834,2064 2834,2321 2850.82,2337.82 U1.63
PE11: P2.11 U1.64 | length 382.8
  Top Layer w10: U1.64 2870.51,2338.49 2884,2325 P2.11
PE12: P2.12 U1.65 | length 516.9
  Top Layer w10: P2.12 2935,2065 2935,2305 2890.19,2349.81 U1.65
PE13: P2.9 U1.66 | length 408
  Top Layer w10: U1.66 2909.88,2359.12 2984,2285 P2.9
PE14: P2.10 U1.67 | length 540.4
  Top Layer w10: U1.67 2929.56,2366.31 3033,2262.87 3033,2063 P2.10
PE15: P2.7 U1.68 | length 433.1
  Top Layer w10: U1.68 2949.25,2373.49 3084,2238.74 P2.7
PF0: P1.21 U1.10 | length 432.4
  Top Layer w10: P1.21 2009,3214 2142.18,3080.82 U1.10
PF1: P1.22 U1.11 | length 540.6
  Top Layer w10: P1.22 1835,3163 2028,3163 2129.86,3061.14 U1.11
PF2: P1.19 U1.12 | length 407.3
  Top Layer w10: P1.19 2044,3114 2116.55,3041.45 U1.12
PF3: P1.20 U1.13 | length 515.5
  Top Layer w10: P1.20 1836,3062 2067,3062 2107.23,3021.77 U1.13
PF4: P1.17 U1.14 | length 382.2
  Top Layer w10: P1.17 2088.13,3014 2100.05,3002.08 U1.14
PF5: P1.18 U1.15 | length 503.1
  Top Layer w10: P1.18 1831,2967 1984,2967 1999.4,2982.4 U1.15
PF6: P1.15 U1.18 | length 410.1
  Top Layer w10: P1.15 1982,2914 2017,2879 2087,2879 2131.34,2923.34 U1.18
PF7: P1.16 U1.19 | length 518.5
  Top Layer w10: P1.16 1839,2859 2096,2859 2140.66,2903.66 U1.19
PF8: P1.13 U1.20 | length 406.2
  Top Layer w10: P1.13 2081,2814 2150.97,2883.97 U1.20
PF9: P1.14 U1.21 | length 540.3
  Top Layer w10: P1.14 1835,2763 1986,2763 2012,2789 2089,2789 2164.29,2864.29 U1.21
PF10: P1.11 U1.22 | length 484.4
  Top Layer w10: P1.11 1992,2714 2024,2682 2057.26,2682 2103,2727.74 2103,2773 2174.6,2844.6 U1.22
PF11: P2.24 U1.49 | length 618
  Top Layer w10: P2.24 2333,2063 2333,2180 2434,2281 2468.35,2281 2575.23,2387.88 U1.49
PF12: P2.21 U1.50 | length 478.2
  Top Layer w10: P2.21 2384,2193 2453,2262 2476.22,2262 2594.92,2380.7 U1.50
PF13: P2.22 U1.53 | length 599.2
  Top Layer w10: P2.22 2434,2064 2434,2210.13 2466.87,2243 2484.09,2243 2653.97,2412.88 U1.53
PF14: P2.19 U1.54 | length 455.8
  Top Layer w10: P2.19 2484,2216.04 2673.66,2405.7 U1.54
PF15: P2.20 U1.55 | length 564
  Top Layer w10: P2.20 2534,2064 2534,2234 2693.34,2393.34 U1.55
PG0: P2.17 U1.56 | length 430.7
  Top Layer w10: P2.17 2584,2257 2713.03,2386.03 U1.56
PG1: P2.18 U1.57 | length 538.9
  Top Layer w10: P2.18 2635,2065 2635,2281.13 2732.71,2378.84 U1.57
PG2: P4.9 U1.87 | length 640.9
  Top Layer w10: U1.87 3316.27,2844.6 3365,2795.87 3365,2682 3388,2659 3538,2659 P4.9
PG3: P4.12 U1.88 | length 480
  Top Layer w10: U1.88 3106.43,2863.6 3324.14,2863.6 3384,2803.74 3384,2737 3408,2713 P4.12
PG4: P4.11 U1.89 | length 569.9
  Top Layer w10: U1.89 3330.64,2883.97 3403,2811.61 3403,2776 3418,2761 3536,2761 P4.11
PG5: P4.14 U1.90 | length 415.8
  Top Layer w10: U1.90 3337.82,2903.66 3428.48,2813 P4.14
PG6: P4.13 U1.91 | length 524
  Top Layer w10: U1.91 3345.01,2923.34 3408.35,2860 3537,2860 P4.13
PG7: P4.16 U1.92 | length 390.7
  Top Layer w10: U1.92 3357.97,2943.03 3388,2913 P4.16
PG8: P4.15 U1.93 | length 498.8
  Top Layer w10: U1.93 3534.29,2962.71 P4.15
PG9: P3.11 U1.124 | length 540.9
  Top Layer w10: U1.124 2732.71,3468.41 2835,3570.7 2835,3765 P3.11
PG10: P3.14 U1.125 | length 407.7
  Top Layer w10: U1.125 2713.03,3475.6 2784,3546.57 P3.14
PG11: P3.13 U1.126 | length 515.8
  Top Layer w10: U1.126 2693.34,3482.78 2736,3525.44 2736,3766 P3.13
PG12: P3.16 U1.127 | length 382.5
  Top Layer w10: U1.127 2674.34,3336.43 2674.34,3490.65 2684,3500.31 P3.16
PG13: P3.15 U1.128 | length 507.2
  Top Layer w10: U1.128 2653.97,3617.03 2634,3637 2634,3764 P3.15
PG14: P3.18 U1.129 | length 399.1
  Top Layer w10: P3.18 2584,3650 2634.29,3599.71 U1.129
PG15: P3.17 U1.132 | length 514.4
  Top Layer w10: U1.132 2575.23,3605.77 2536,3645 2536,3766 P3.17
RSET: C3.2 JTAG.15 KEY.1 R3.1 U1.25 | length 2058.7
  Top Layer w10: U1.25 v2(2382.45,2785.55)
  Bottom Layer w10: v1(2280,3570) 2280,3538 2312.1,3505.9 C3.2@2457.76,3505.9 ; v2(2382.45,2785.55) 2382.45,3091.45 2486,3195 2534,3195 2567,3228 2567,3352 2581.97,3366.97 R3.1 2640.86,3410.14 2608,3443 2473,3443 2459.3,3456.7 C3.2 C3.2@2457.76,3505.9 ; JTAG.15 2406,4081 2406,3892 2434,3864 2434,3613 2457.76,3589.24 C3.2@2457.76,3505.9
VCC: C17.2 P1.1 P2.1 P3.29 P4.30 R9.2 S1.1 U2.3 | length 6175.4
  Top Layer w20: S1.1 2407.8,1874 C17.2 2565.4,1887 3142,1887 R9.2@3256,1773
  Bottom Layer w30: 1970,2214 P1.1 1884,2151 1856,2123 1740,2123 1723,2140 1723,3637 1767,3681 1875,3681 1920,3726 1920,3785 1949,3814 P3.29 ; 2094,2190 3384,2190 ; P2.1 3384,2190 ; P4.30 3384,3513 3384,2190
VREF+: U1.32
VREF-: U1.31
pads on no net: JTAG.11 JTAG.17 JTAG.19 S1.4 S1.5 S1.6 U1.106 USB. USB.2 USB.3 USB.4 USB.6 XTAL2.0

## Polygon pours and split planes (outlines as drawn)
GND on Top Layer "Bottom Layer-No Net" (solid, pour order 9): 1690,4275 1690,1580 3670,1580 3670,4275
NetS1_2 on Top Layer "Bottom Layer-No Net" (solid, pour order 6): 1967,1940 1968,1939 3383,1939 3383,1580 3384,1579 3377,1586 1968,1586 1946,1586 1946,1757 1946,1939
GND on Bottom Layer "Bottom Layer-No Net" (solid, pour order 11): 1690,4275 1690,1580 3670,1580 3670,4275
VCC on Bottom Layer "Bottom Layer-No Net" (solid, pour order 7): 1959,2316 1959,2329 1959,2342 2033,2342 2108,2342 2108,2329 2108,2316 2108,2169 2110,2167 2302,2167 2302,1782 1959,1782
no net on Top Solder "Bottom Layer-No Net" (solid): 3532,3919 3591,3919 3591,3713 3590,3713 3561,3684 3532,3713 3532,3714

## Keep-outs
Keep-Out Layer:
  the board outline again, w10

## Silkscreen, mask and mechanical layers (free items; w line width, h text height)
Top Overlay:
  lines w8: 1934,2164 3436,2164 3436,3661 ; 1935,2165 1935,3663 3434,3663 ; 3528,3926 3527,3927 3495,3927 3495,3956 3496,3957 3542,3957 3544,3959 ; 3544,4043 3535,4052 3523,4052 3521,4054 3521,4066 3532,4077 3591,4077 3602,4066 3602,4054 3600,4052 3588,4052 3579,4043 ; 3547,3971 cw(c3487.74,3749.84) 3578.09,3960.22 ; 3547,3987.75 cw(c3487.74,3766.59) 3578.09,3976.97 ; 3547,4004.5 cw(c3487.74,3783.34) 3578.09,3993.72 ; 3547,4021.25 cw(c3487.74,3800.09) 3578.09,4010.47 ; 3547,4038 cw(c3487.74,3816.84) 3578.09,4027.22 ; 3595,3926 3596,3927 3628,3927 3628,3956 3627,3957 3581,3957 3579,3959 ; 3544,3959 3544,4042 3578,4042 3579,4043 ; 3544,3959 3579,3959 ; 3579,3959 3579,4043 ; 1710,3733 1910,3733 1910,4032 1710,4032 1710,3733 ; 3528,3712 3561.5,3678.5 3595,3712 3595,3740 3595,3785 3595,3923 3528,3923 3528,3785 3528,3740 3528,3712
  lines w10: 1810,3734 1810,4030
  text "0" at 1824,4050 h50 r90
  text "JLCJLCJLCJLC" at 2112,3936 h40
  text "BO0" at 1998,3878 h40
  text "BO1" at 1923,3876 h40
  text "B8" at 2349,3844.62 h40 r90
  text "B6" at 2448,3845.16 h40 r90
  text "B4" at 2545,3844.11 h40 r90
  text "G9" at 2949,3840.83 h40 r90
  text "D6" at 3045,3839.55 h40 r90
  text "D2" at 3248,3839 h40 r90
  text "D0" at 3347,3839 h40 r90
  text "D4" at 3145,3838.49 h40 r90
  text "C11" at 3451,3835 h40 r90
  text "B10" at 2244,3827.85 h40 r90
  text "G11" at 2850,3826.4 h40 r90
  text "G15" at 2648,3823.91 h40 r90
  text "G13" at 2747,3823.71 h40 r90
  text "B12" at 2144,3819 h40 r90
  text "VCC" at 2049,3813.53 h40 r90
  text "B5" at 2448,3754.97 h40 r90
  text "B3" at 2547,3754.77 h40 r90
  text "B7" at 2348,3752 h40 r90
  text "D1" at 3247,3751.84 h40 r90
  text "D7" at 2947,3749.19 h40 r90
  text "D5" at 3047,3749.35 h40 r90
  text "D3" at 3147,3749.15 h40 r90
  text "B9" at 2247,3748 h40 r90
  text "B11" at 2149,3740.69 h40 r90
  text "C10" at 3450,3740 h40 r90
  text "C12" at 3345,3738 h40 r90
  text "G14" at 2648,3732.74 h40 r90
  text "G12" at 2748,3733.24 h40 r90
  text "G10" at 2847,3733.24 h40 r90
  text "GND" at 2047,3712.69 h40 r90
  text "1" at 1831,3686 h50 r90
  text "E3" at 1722,3556 h40
  text "E2" at 1823,3553 h40
  text "VCC" at 3443,3549 h40
  text "GND" at 3561.66,3548.84 h40
  text "STM32F103ZET6" at 2757,3517 h80
  text "复位" at 2003,3455 h100 r45
  text "A14" at 3504,3455 h40
  text "A15" at 3589,3454 h40
  text "E5" at 1722,3452 h40
  text "E4" at 1823,3452 h40
  text "A12" at 3505,3353 h40
  text "C13" at 1722.04,3352 h40
  text "E6" at 1823,3352 h40
  text "A13" at 3588,3351 h40
  text "C15" at 1722.04,3252 h40
  text "C14" at 1823.04,3252 h40
  text "A10" at 3503,3252 h40
  text "A11" at 3592,3249 h40
  text "A9" at 3602,3152 h40
  text "F1" at 1722.04,3151 h40
  text "F0" at 1823.04,3151 h40
  text "A8" at 3511,3151 h40
  text "F2" at 1823.04,3053 h40
  text "F3" at 1722.04,3052 h40
  text "C9" at 3605,3052 h40
  text "C8" at 3512,3050 h40
  text "C7" at 3603,2952 h40
  text "F5" at 1722.04,2951 h40
  text "F4" at 1823.04,2950 h40
  text "C6" at 3514,2950 h40
  text "F7" at 1722.04,2853 h40
  text "G8" at 3598,2852 h40
  text "G7" at 3511,2851 h40
  text "F6" at 1823.04,2850 h40
  text "F8" at 1823.04,2752 h40
  text "F9" at 1722.04,2751 h40
  text "G5" at 3510,2751 h40
  text "G6" at 3598,2751 h40
  text "G3" at 3508,2654 h40
  text "G4" at 3598,2654 h40
  text "C0" at 1722.04,2652 h40
  text "F10" at 1823.04,2652 h40
  text "C2" at 1722.04,2553 h40
  text "D15" at 3500,2553 h40
  text "G2" at 3597,2553 h40
  text "C1" at 1823.04,2552 h40
  text "A0" at 1721.96,2452 h40
  text "C3" at 1823.04,2452 h40
  text "D13" at 3505,2452 h40
  text "D14" at 3588,2451 h40
  text "A2" at 1721.96,2352 h40
  text "A1" at 1822.96,2351 h40
  text "D11" at 3503,2350 h40
  text "D12" at 3590,2350 h40
  text "北方民族大学" at 2622,2316 h120
  text "A4" at 1721.96,2253 h40
  text "A3" at 1822.96,2252 h40
  text "D10" at 3589,2252 h40
  text "D9" at 3510,2251 h40
  text "电子设计团队" at 2788,2207 h100
  text "B15" at 3506,2145 h40
  text "D8" at 3597,2141 h40
  text "VCC" at 1838,2140 h40
  text "GND" at 1722,2139 h40
  text "VCC" at 3456,2055 h40 r90
  text "A5" at 2043,2050 h40 r90
  text "A7" at 2147,2050 h40 r90
  text "C5" at 2250,2050.08 h40 r90
  text "B1" at 2348,2050.08 h40 r90
  text "F12" at 2447,2050.08 h40 r90
  text "F14" at 2551,2050.08 h40 r90
  text "G0" at 2649,2050.04 h40 r90
  text "E7" at 2747,2050.04 h40 r90
  text "E9" at 2845,2050.04 h40 r90
  text "E11" at 2946,2050.04 h40 r90
  text "E13" at 3047,2050.04 h40 r90
  text "E15" at 3148,2050.04 h40 r90
  text "B11" at 3247,2050.08 h40 r90
  text "B13" at 3343,2050.08 h40 r90
  text "A6" at 2045,1953 h40 r90
  text "C4" at 2146,1953.08 h40 r90
  text "B0" at 2250,1953.08 h40 r90
  text "F11" at 2347,1953.08 h40 r90
  text "F13" at 2447,1953.08 h40 r90
  text "F15" at 2547,1953.08 h40 r90
  text "G1" at 2646,1953.04 h40 r90
  text "E8" at 2746,1953.04 h40 r90
  text "E10" at 2844,1953.04 h40 r90
  text "E12" at 2947,1953.04 h40 r90
  text "E14" at 3045,1953.04 h40 r90
  text "B10" at 3146,1953.08 h40 r90
  text "B12" at 3244,1953.08 h40 r90
  text "B14" at 3343,1953.08 h40 r90
  text "GND" at 3458,1953.04 h40 r90
Bottom Overlay:
  text "若风不曾轻拂柳" at 3278,2449 h100
  text "何来飘扬细垂枝" at 3273,2299 h100

## Text inside footprints (layer, text, board x,y; h text height)
USB: Top Overlay "+" at 2665.51,1767 h39.37